# Altium PCB PCB1.PcbDoc
Units mil, origin at the board's own origin, x right, y up, seen from the top; angles counter-clockwise.
Board outline 3850 x 2765 mil, 4 copper layers (Top Layer, GND, 3V3, Bottom Layer 1), stack 23.756 mil thick; 67 components, 82 nets, 282 pads, 92 vias.
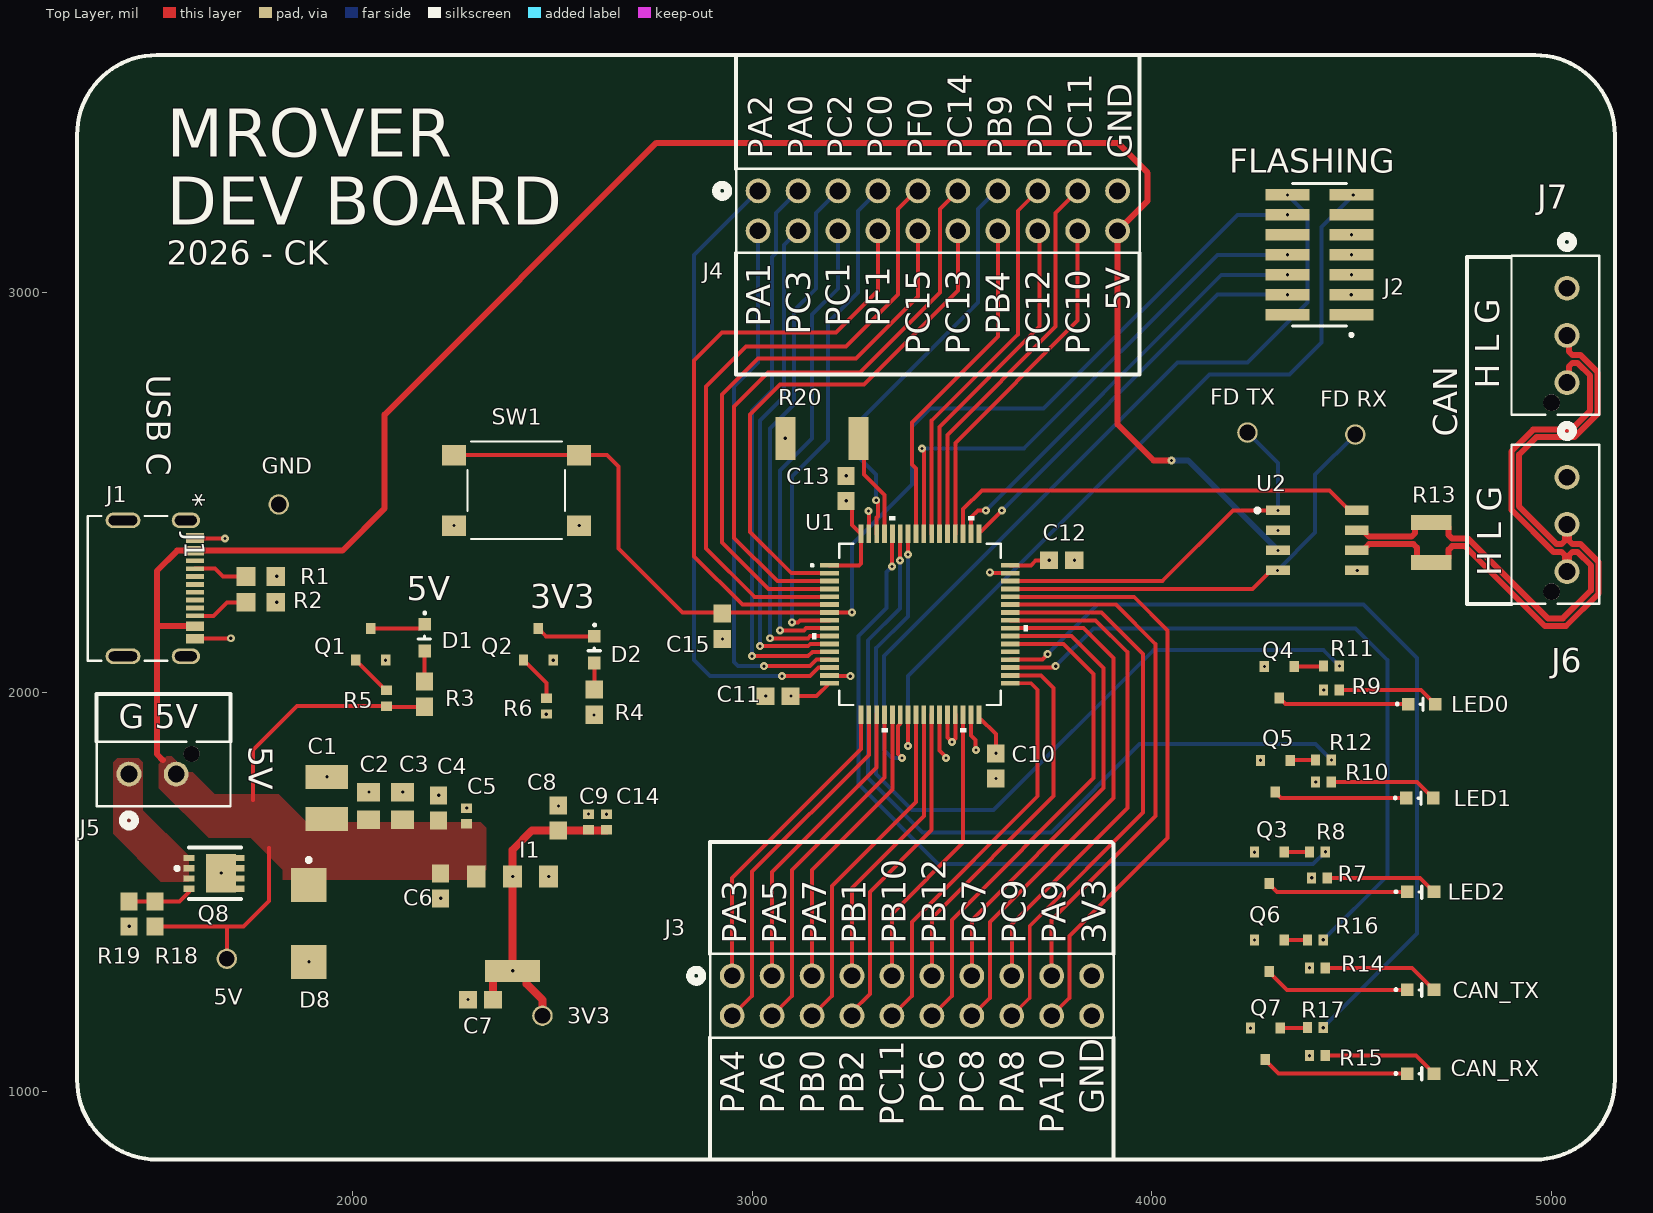
[diagram p0: Top Layer view]
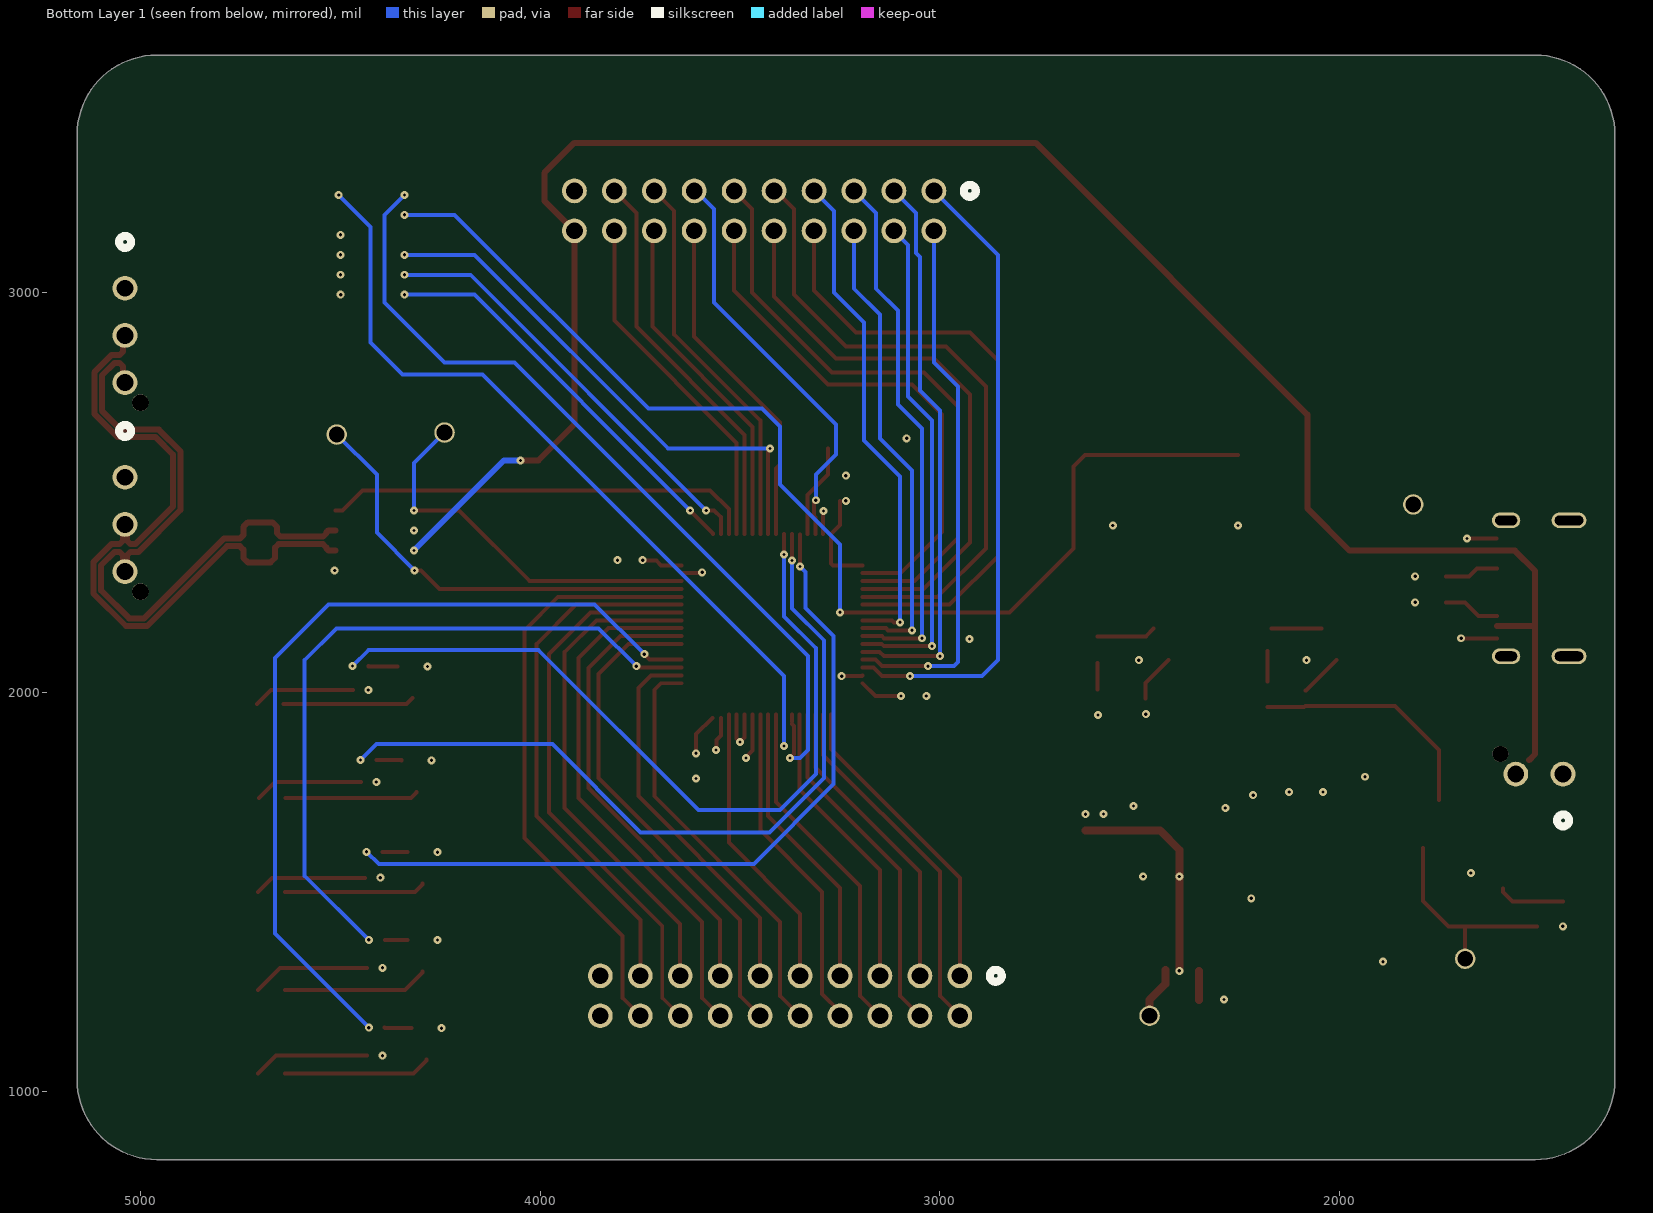
[diagram p1: Bottom Layer 1 view, seen from below]
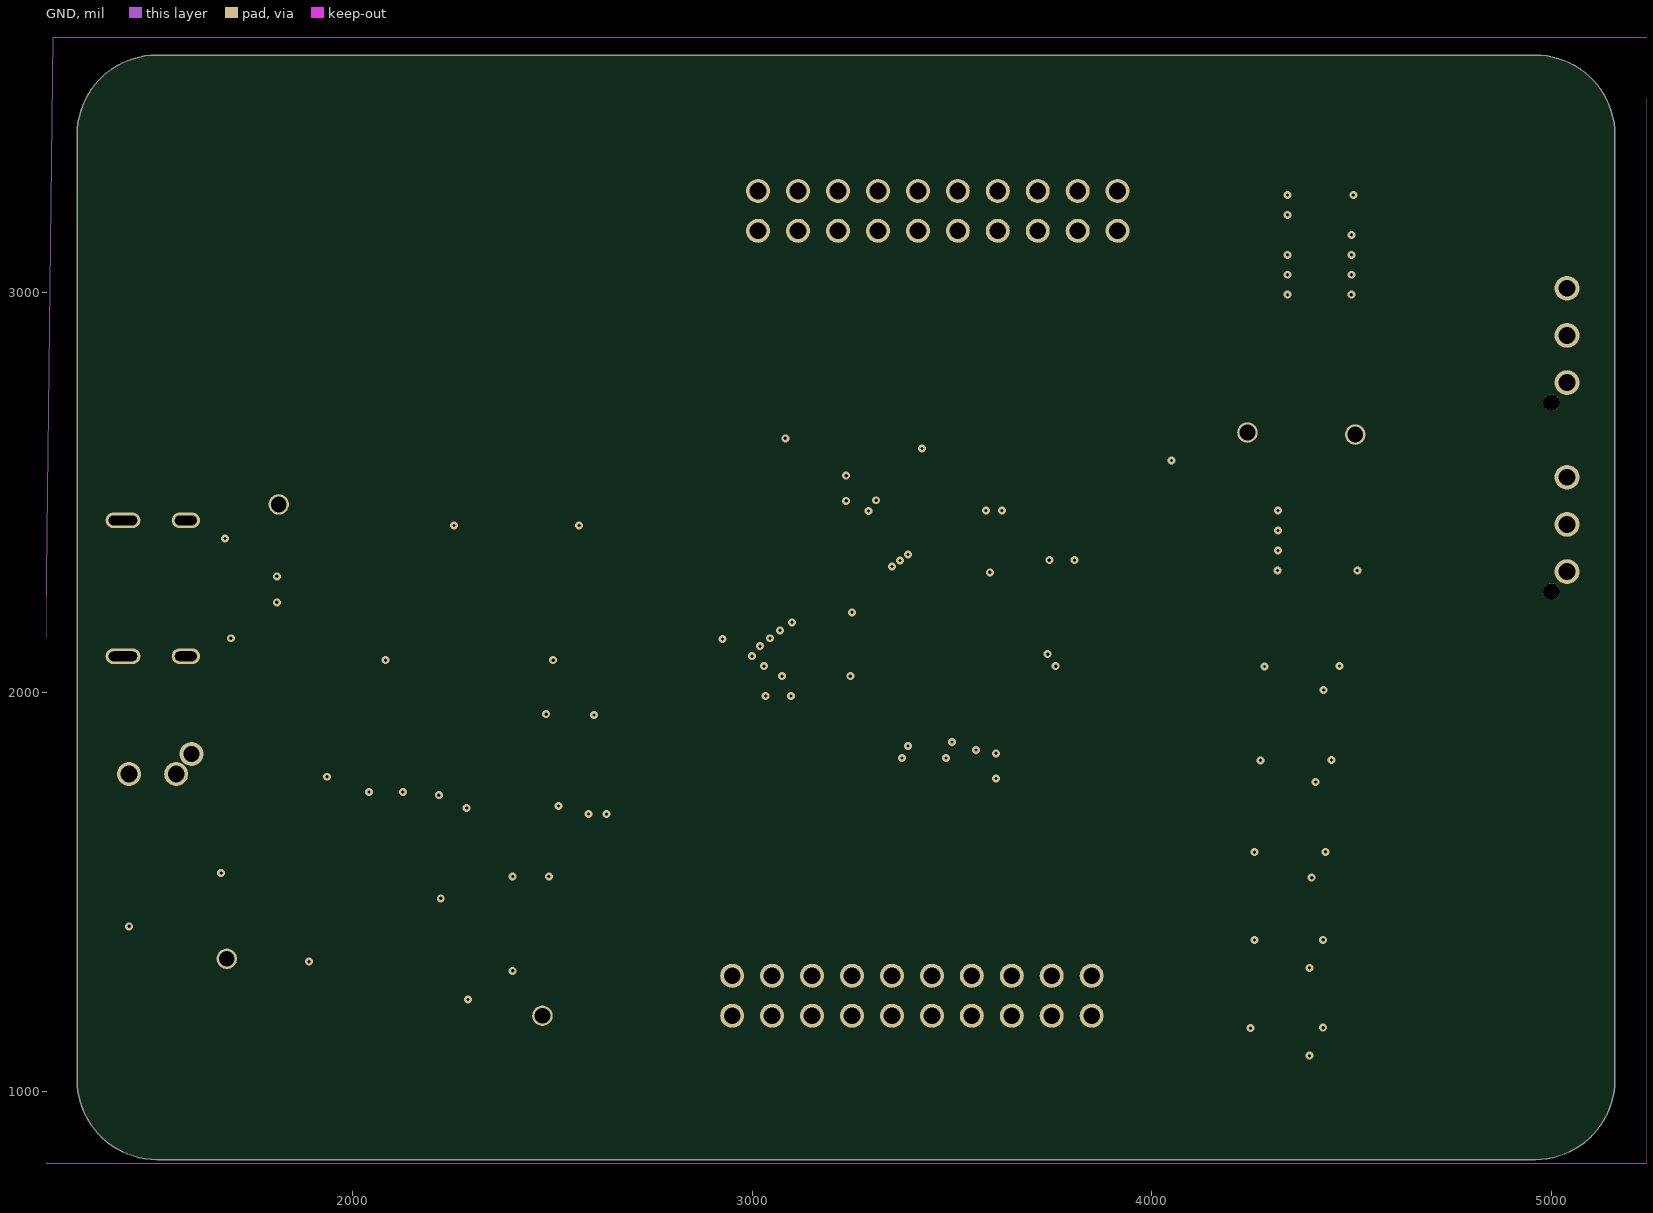
[diagram p2: GND]
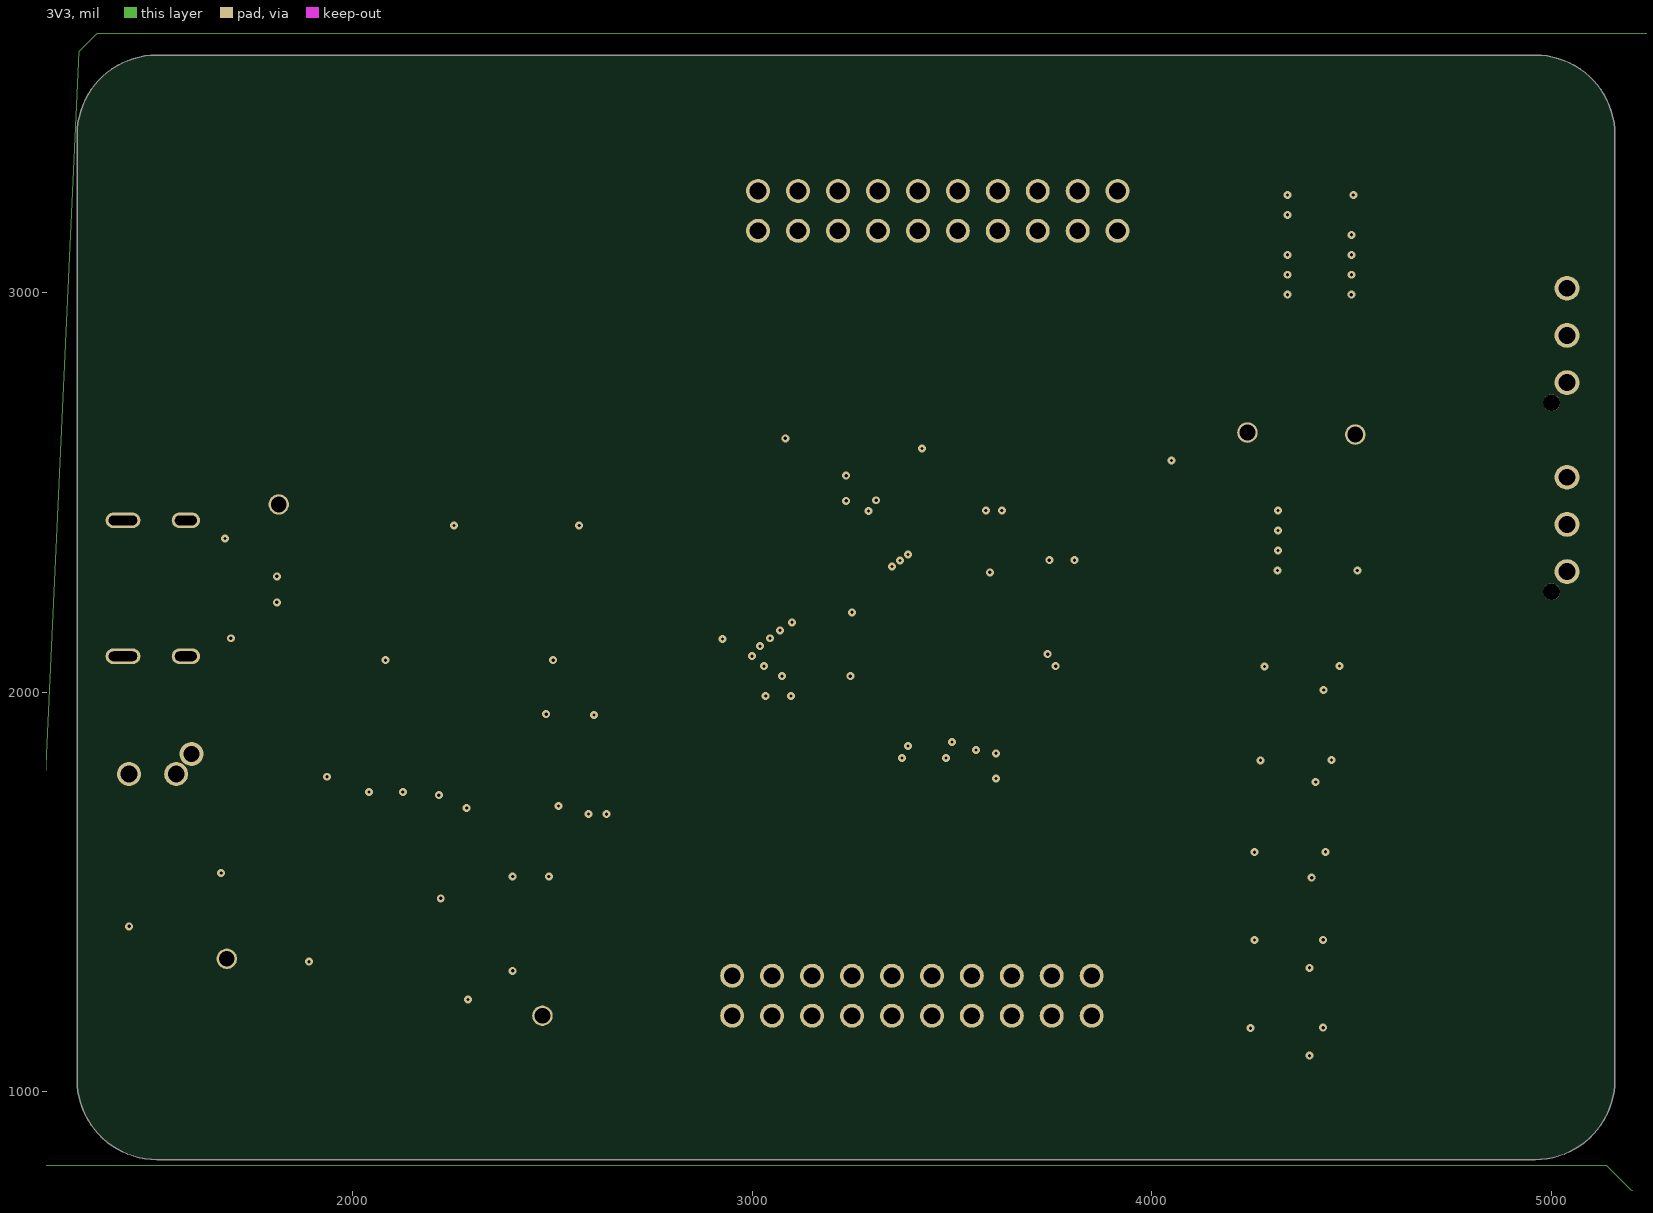
[diagram p3: 3V3]

## Layer stack, top to bottom
Top Solder: solder mask 0.4, Solder Resist, Dk 3.5
Top Layer: signal copper 1.378
Dielectric 2: prepreg 2.8, PP-006, Dk 4.1
GND: signal copper 1.4
Dielectric 1: dielectric 12.6, FR-4, Dk 4.8
3V3: signal copper 1.4
Dielectric 3: prepreg 2.8, PP-006, Dk 4.1
Bottom Layer 1: signal copper 1.378
Bottom Solder: solder mask 0.4, Solder Resist, Dk 3.5

## Board outline
1310,1030 1310,3395 cw(c1510,3395) 1510,3595 4960,3595 cw(c4960,3395) 5160,3395 5160,1030 cw(c4960,1030) 4960,830 1510,830 cw(c1510,1030)

## Design rules (kind name [scope] priority, off if disabled: settings)
BoardOutlineClearance [All] p1: gap=7.87 ignorepadtopadclearanceinfootprint=FALSE
Clearance [All] p1: gap=4 ignorepadtopadclearanceinfootprint=FALSE except(5: Arc-Via Track-Via SMDPad-Via THPad-Via Via-Via Via-Fill Via-Poly Via-Region Via-Text; 9.84: Arc-Hole Track-Hole SMDPad-Hole THPad-Hole Via-Hole Fill-Hole Poly-Hole Region-Hole Text-Hole)
ComponentClearance [All] p1: gap=4 collisioncheckmode=3 verticalgap=4 showdistances=TRUE
DiffPairsRouting [All] p1: maxlimit=4 minlimit=4 mostfreqgap=4 toplayer_minwidth=4 toplayer_maxwidth=71497.94 toplayer_prefwidth=4 midlayer1_minwidth=4 midlayer1_maxwidth=71497.94 midlayer1_prefwidth=4 midlayer2_minwidth=4 midlayer2_maxwidth=71497.94 midlayer2_prefwidth=4 bottomlayer_minwidth=4 bottomlayer_maxwidth=71497.94 bottomlayer_prefwidth=4 maxuncoupledlength=500
Height [All] p1: minheight=0 maxheight=71497.94 prefheight=500
HoleSize [All] p1: absolutevalues=TRUE maxlimit=248.03 minlimit=7.87 maxpercent=80.000 minpercent=20.000
HoleToHoleClearance [All] p1: gap=9.84 allowstackedmicrovias=FALSE
MinimumAnnularRing [All] p1: minimumring=3
MinimumSolderMaskSliver [All] p1: minsoldermaskwidth=0
PlaneClearance [All] p1: clearance=4
PlaneConnect PlaneConnectPowerPads [InPadClass('PowerPads')] p1: planeconnectstyle=Direct reliefexpansion=20 reliefentries=4 reliefconductorwidth=10 reliefairgap=10
PlaneConnect [All] p2: pad.planeconnectstyle=Relief pad.reliefexpansion=11.81 pad.reliefentries=4 pad.reliefconductorwidth=4 pad.reliefairgap=4 via.planeconnectstyle=Direct via.reliefexpansion=11.81 via.reliefentries=4 via.reliefconductorwidth=5 via.reliefairgap=5
PolygonConnect PolygonConnectPowerPads [All vs (InPadClass('PowerPads'))] p1: connectstyle=Direct reliefconductorwidth=10 reliefentries=4 polygonreliefangle="90 Angle" airgapwidth=10
PolygonConnect [All] p2: connectstyle=Direct reliefconductorwidth=4 reliefentries=4 polygonreliefangle="90 Angle" airgapwidth=4
RoutingVias [All] p1: holewidth=7.87 width=17.72 viastyle="Through Hole" minholewidth=7.87 minwidth=17.72 maxholewidth=248.03 maxwidth=257.87
SilkToSilkClearance [All] p1: silktosilkclearance=0
SilkToSolderMaskClearance [IsPad] p1: minsilkscreentomaskgap=4 clearancetoexposedcopper=TRUE
SolderMaskExpansion [All] p1: expansion=2.95 istentingtop=FALSE
SupplyNets "Schematic Supply Nets_2" [InNet('3V3')] p1: voltage=0.000
SupplyNets "Schematic Supply Nets_1" [InNet('GND')] p2: voltage=0.000
SupplyNets "Schematic Supply Nets" [InNet('5V')] p3: voltage=0.000
Width [All] p1: maxlimit=71497.94 minlimit=4 preferedwidth=4
20 further rules are at their usual default settings.

## Classes and differential pairs
component class MCU: * C8 C9 C10 C11 C12 C13 C14 C15 D3 D4 D5 J2 J3 J4 Q3 Q4 Q5 R7 R8 R9 R10 R11 R12 R20 SW1 U1
component class Input_Power: * C1 C2 C3 C4 C5 C6 C7 D1 D2 D8 I1 J1 J5 Q1 Q2 Q8 R1 R2 R3 R4 R5 R6 R18 R19 TP1 TP2 TP3
component class CAN: * D6 D7 "FD RX" "FD TX" J6 J7 Q6 Q7 R13 R14 R15 R16 R17 U2
differential pair CAN: +CAN_H -CAN_L

## Components (designator, comment, footprint, x,y, rotation, side; value= is the part's Value field where it differs from the comment)
3V3 "5003" TEST-POINT-0001 2475,1190 r0 top (schematic designator TP2)
5V "5003" TEST-POINT-0001 1685,1332.5 r0 top (schematic designator TP1)
C1 "CL32B106KBJNNNE" CAP-1210 1935,1735 r270 top
C2 "CC0805KKX7R9BB105" CAP-0805 2040,1715 r270 top
C3 "CC0805KRX7R9BB104" CAP-0805 2125,1715 r270 top
C4 "CC0603KPX7R9BB103" CAP-0603 2215,1710 r270 top
C5 "CC0402KRX7R9BB102" CAP-0402 2285,1690 r270 top
C6 "GRM188R61A106ME69D" CAP-0603 2220,1515 r270 top
C7 "GRM188R61A106ME69D" CAP-0603 2320,1230 r180 top
C8 "CC0603ZRY5V9BB104" CAP-0603 2515,1685 r90 top
C9 "GRM155R61A475MEAAD" CAP-0402 2590,1675 r90 top
C10 "CC0603ZRY5V9BB104" CAP-0603 3610,1815 r270 top
C11 "CC0603ZRY5V9BB104" CAP-0603 3065,1990 r180 top
C12 "CC0603ZRY5V9BB104" CAP-0603 3775,2330 r0 top
C13 "CC0603ZRY5V9BB104" CAP-0603 3235,2510 r90 top
C14 "GRM155R61A475MEAAD" CAP-0402 2635,1675 r90 top
C15 "CC0603ZRY5V9BB104" CAP-0603 2925,2165 r270 top
CAN_RX "BL-HKC36G-AV-TRB" LED-0603 4616.81,1015.42 r0 top (schematic designator D7)
CAN_TX "BL-HKC36G-AV-TRB" LED-0603 4616.81,1225.42 r0 top (schematic designator D6)
D1 "BL-HKC36G-AV-TRB" LED-0603 2150.43,2193.2 r270 top
D2 "BL-HKC36G-AV-TRB" LED-0603 2575.43,2163.2 r270 top
D8 "SMBJ40CA" "DO-214AA (SMBJ)" 1890,1420 r90 top
"FD RX" "5003" TEST-POINT-0001 4510,2645 r0 top (schematic designator TP5)
"FD TX" "5003" TEST-POINT-0001 4240,2650 r0 top (schematic designator TP4)
GND "5003" TEST-POINT-0001 1815,2470 r0 top (schematic designator TP3)
I1 "LM1117IMPX-3.3/NOPB" IC-SOT-223-4 2400,1420 r270 top
J1 "2171790001" 2171790001_MOL 1475,2260 r270 top
J2 "FTSH-107-01-L-DV-K" SAMTEC_FTSH-107-01-L-DV-K 4420.12,3095 r90 top
J3 "10897201" CONN20_0010897201_MOL 2950,1290 r0 top
J4 "10897201" CONN20_0010897201_MOL 3015,3255 r0 top
J5 "2068320201" CONN_2068320000-SD_02_MOL 1440,1795 r270 top
J6 "2165712003" CONN_2165710003-SD_03_MOL 5040,2538.11 r90 top
J7 "2165712003" CONN_2165710003-SD_03_MOL 5040,3011.22 r90 top
LED0 "BL-HKC36G-AV-TRB" LED-0603 4619.81,1940.42 r0 top (schematic designator D4)
LED1 "BL-HKC36G-AV-TRB" LED-0603 4614.81,1705.42 r0 top (schematic designator D5)
LED2 "BL-HKC36G-AV-TRB" LED-0603 4616.81,1470.42 r0 top (schematic designator D3)
Q1 "T2N7002AK,LM" IC-SOT23-3 2045,2120 r0 top
Q2 "T2N7002AK,LM" IC-SOT23-3 2465,2120 r0 top
Q3 "T2N7002AK,LM" IC-SOT23-3 4295,1560 r180 top
Q4 "T2N7002AK,LM" IC-SOT23-3 4320,2025 r180 top
Q5 "T2N7002AK,LM" IC-SOT23-3 4310,1790 r180 top
Q6 "T2N7002AK,LM" IC-SOT23-3 4295,1340 r180 top
Q7 "T2N7002AK,LM" IC-SOT23-3 4285,1119.37 r180 top
Q8 "CSD18543Q3AT" IC-8VSONCLIP 1555.47,1618.93 r270 top
R1 "RC0805JR-075K1L" RES-0805 1770,2290 r0 top
R2 "RC0805JR-075K1L" RES-0805 1770,2225 r0 top
R3 "RC0603FR-072KL" RES-0603 2180,1995 r90 top
R4 "RT0603FRE131KL" RES-0603 2605,1975 r90 top
R5 "RC0402FR-07470RL" RES-0402 2085,1985 r90 top
R6 "RC0402FR-07470RL" RES-0402 2485,1965 r90 top
R7 "RC0402FR-07100RL" RES-0402 4420,1535 r0 top
R8 "RC0402FR-07470RL" RES-0402 4415,1600 r180 top
R9 "RC0402FR-07100RL" RES-0402 4450,2005 r0 top
R10 "RC0402FR-07100RL" RES-0402 4430,1775 r0 top
R11 "RC0402FR-07470RL" RES-0402 4450,2065 r180 top
R12 "RC0402FR-07470RL" RES-0402 4430,1830 r180 top
R13 "RC1210FR-07120RL" RES-1210 4700,2375 r90 top
R14 "RC0402FR-07100RL" RES-0402 4415,1310 r0 top
R15 "RC0402FR-07100RL" RES-0402 4415,1090 r0 top
R16 "RC0402FR-07470RL" RES-0402 4410,1380 r180 top
R17 "RC0402FR-07470RL" RES-0402 4410,1160 r180 top
R18 "RES 0603" RES-0603 1505,1445 r270 top
R19 "RES 0603" RES-0603 1440,1445 r90 top
R20 "CRF2010-J/-000ELF" RES-2010 3175,2635 r0 top
SW1 "430182095816" 430182095816 2410,2505 r0 top
U1 "STM32G431RBT6" LQFP64-10x10mm 3420,2170 r0 top
U2 "TCAN1044VDRQ1" IC-8SOIC 4415,2380 r270 top

## Footprints (in the part's own frame and the unit in brackets; to place one, negate y for a bottom-side part, rotate by r counter-clockwise, add the part's x,y. Pads: shape width x height; smd on the part's side, far side on the other; paste and mask are expansions set on the pad)
2171790001_MOL [mil]
  oval 39x87 hole 71 slot 24 at 0 deg paste-99999 mask-43.5: 13(-170.08,-50.07) 14(170.08,-50.07)
  oval 39x71 hole 55 slot 24 at 0 deg paste-99999 mask-35.5: 15(-170.08,107.41) 16(170.08,107.41)
  rect 24x45 smd paste+0 mask+0: A1/B12(-125.98,130.05) A4/B9(-94.49,130.05) B1/A12(125.98,130.05) B4/A9(94.49,130.05)
  rect 12x45 smd paste+0 mask+0: A5(-49.21,130.05) A6(-9.84,130.05) A7(9.84,130.05) A8(49.21,130.05) B5(68.9,130.05) B6(29.53,130.05) B7(-29.53,130.05) B8(-68.9,130.05)
  silkscreen extent -181,-138 181,61
430182095816 [mm] "SMD Tact Switch, body 6x6mm"
  rect 1.55x1.3 smd: A1(-3.975,2.25) A2(3.975,2.25) B1(-3.975,-2.25) B2(3.975,-2.25)
  silkscreen extent -3.1,-3.1 3.1,3.1, body extent -4.5,-3.1 4.5,3.1, height 9.5
CAP-0402 [mm]
  rect 0.6x0.7 smd: 1(-0.5,0) 2(0.5,0)
  body extent -0.5,-0.22 0.5,0.23, height 0.5
CAP-0603 [mm]
  rect 1.15x1.1 smd: 1(-0.8,0) 2(0.8,0)
  body extent -0.8,-0.45 0.8,0.45, height 0.8
CAP-0805 [mm]
  rect 1.16x1.47 smd: 1(-0.88,0) 2(0.88,0)
  body extent -1,-0.63 1,0.63, height 0.94
CAP-1210 [mm]
  rect 1.53x2.72 smd: 1(-1.341,0) 2(1.341,0)
  body extent -1.6,-1.25 1.6,1.25, height 2.7
CONN20_0010897201_MOL [mil]
  round 62 / inner round 60 / far side round 62 hole 42 paste-99999 mask+0: 1(0,0) 2(0,-100) 3(100,0) 4(100,-100) 5(200,0) 6(200,-100) 7(300,0) 8(300,-100) 9(400,0) 10(400,-100) 11(500,0) 12(500,-100) 13(600,0) 14(600,-100) 15(700,0) 16(700,-100) 17(800,0) 18(800,-100) 19(900,0) 20(900,-100)
  silkscreen extent -105,-155 955,55, body extent -51,-147 949,53, height 329
CONN_2068320000-SD_02_MOL [mil]
  round 62 / inner round 60 / far side round 62 hole 42 paste-99999 mask+0: 1(0,0) 2(0,118.11)
  round 40 / inner round 60 / far side round 40 hole 40 unplated paste-99999 mask+0: 3(-50.39,156.69)
  silkscreen extent -81,-81 131,254, body extent -76,-76 76,249, height 392
CONN_2165710003-SD_03_MOL [mil]
  round 62 hole 42 paste-99999 mask+0: 1(0,0) 2(-118.11,0) 3(-236.22,0)
  round 42 hole 42 unplated paste-99999 mask+0: 4(-286.61,38.58)
  silkscreen extent -317,-81 131,139, body extent -312,-75 76,135, height 394
"DO-214AA (SMBJ)" [mm]
  rect 2.16x2.26 smd: 1(-2.416,0) 2(2.484,0)
  silkscreen extent 3.94,-0.13 4.19,0.12, body extent -2.72,-1.95 2.78,1.95, height 2.45
IC-8SOIC [mm]
  rect 0.6x1.5 smd: 1(-1.905,-2.5) 2(-0.635,-2.5) 3(0.635,-2.5) 4(1.905,-2.5) 5(1.905,2.5) 6(0.635,2.5) 7(-0.635,2.5) 8(-1.905,2.5)
  silkscreen extent -2.03,-3.93 -1.78,-3.68, body extent -2.45,-3 2.45,3, height 1.75
IC-8VSONCLIP [mm]
  rect 0.4x0.7 smd paste-100 mask+0.05: 1(2.812,0.877) 2(0.862,0.877) 2(1.512,0.877) 2(2.162,0.877) 3(0.862,4.077) 3(1.512,4.077) 3(2.162,4.077) 3(2.812,4.077)
  rect 2.45x1.9 smd paste-100 mask+0.05: 3(1.837,2.917)
  silkscreen extent 0.19,0.03 3.49,4.18, body extent 0.18,0.89 3.48,4.19, height 1.1
IC-SOT23-3 [mm]
  rect 0.6x0.7 smd: 1(-0.95,-1) 2(0.95,-1) 3(0,1)
  body extent -1.46,-1.18 1.46,1.19, height 1.12
IC-SOT-223-4 [mm]
  rect 1.4x1.2 smd mask+0.07: 1(-3,2.3) 3(-3,-2.3) 4(-3,0)
  rect 1.4x3.5 smd: 2(3,0)
  body extent -3.5,-3.25 3.5,3.25, height 1.68
LED-0603 [mm]
  rect 0.8x0.8 smd: 1(2.291,0.751) 2(0.589,0.751)
  silkscreen extent -0.2,0.34 1.52,1.13, body extent 0.65,0.36 2.25,1.16, height 0.39
LQFP64-10x10mm [mil]
  rect 47x12 smd paste+0 mask+0: 1(-226.38,147.64) 2(-226.38,127.95) 3(-226.38,108.27) 4(-226.38,88.58) 5(-226.38,68.9) 6(-226.38,49.21) 7(-226.38,29.53) 8(-226.38,9.84) 9(-226.38,-9.84) 10(-226.38,-29.53) 11(-226.38,-49.21) 12(-226.38,-68.9) 13(-226.38,-88.58) 14(-226.38,-108.27) 15(-226.38,-127.95) 16(-226.38,-147.64) 33(226.38,-147.64) 34(226.38,-127.95) 35(226.38,-108.27) 36(226.38,-88.58) 37(226.38,-68.9) 38(226.38,-49.21) 39(226.38,-29.53) 40(226.38,-9.84) 41(226.38,9.84) 42(226.38,29.53) 43(226.38,49.21) 44(226.38,68.9) 45(226.38,88.58) 46(226.38,108.27) 47(226.38,127.95) 48(226.38,147.64)
  rect 12x47 smd paste+0 mask+0: 17(-147.64,-226.38) 18(-127.95,-226.38) 19(-108.27,-226.38) 20(-88.58,-226.38) 21(-68.9,-226.38) 22(-49.21,-226.38) 23(-29.53,-226.38) 24(-9.84,-226.38) 25(9.84,-226.38) 26(29.53,-226.38) 27(49.21,-226.38) 28(68.9,-226.38) 29(88.58,-226.38) 30(108.27,-226.38) 31(127.95,-226.38) 32(147.64,-226.38) 49(147.64,226.38) 50(127.95,226.38) 51(108.27,226.38) 52(88.58,226.38) 53(68.9,226.38) 54(49.21,226.38) 55(29.53,226.38) 56(9.84,226.38) 57(-9.84,226.38) 58(-29.53,226.38) 59(-49.21,226.38) 60(-68.9,226.38) 61(-88.58,226.38) 62(-108.27,226.38) 63(-127.95,226.38) 64(-147.64,226.38)
  silkscreen extent -273,-270 270,270, body extent -236,-236 236,236, height 63
RES-0402 [mm]
  rect 0.6x0.7 smd: 1(-0.5,0) 2(0.5,0)
  body extent -0.5,-0.25 0.5,0.25, height 0.3
RES-0603 [mm]
  rect 1.15x1.1 smd: 1(-0.8,0) 2(0.8,0)
  body extent -0.8,-0.4 0.8,0.4, height 0.43
RES-0805 [mm]
  rect 1.2x1.2 smd: 1(-0.95,0) 2(0.95,0)
  body extent -1,-0.6 1,0.6, height 0.71
RES-1210 [mm] "Chip Resistor, 2-Leads, Body 3.10x2.60mm, IPC High Density"
  rect 0.95x2.6 smd: 1(-1.275,0) 2(1.275,0)
  body extent -1.6,-1.35 1.6,1.35, height 0.6
RES-2010 [mm]
  rect 1.26x2.72 smd: 1(-2.325,0) 2(2.325,0)
  body extent -2.5,-1.25 2.5,1.25, height 0.7
SAMTEC_FTSH-107-01-L-DV-K [mm]
  rect 0.74x2.79 smd: 01(-3.81,-2.035) 02(-3.81,2.035) 03(-2.54,-2.035) 04(-2.54,2.035) 05(-1.27,-2.035) 06(-1.27,2.035) 07(0,-2.035) 08(0,2.035) 09(1.27,-2.035) 10(1.27,2.035) 11(2.54,-2.035) 12(2.54,2.035) 13(3.81,-2.035) 14(3.81,2.035)
  silkscreen extent -5.19,-2.13 4.53,1.72, body extent -4.44,-2.82 4.44,3.02, height 5.96
TEST-POINT-0001 [mm] "2024 miniature test point"
  round 1.3 hole 1: 1(0,0)
  body extent -1.27,-1.27 1.27,1.27, height 4.57

## Part data
3V3 5V "FD RX" "FD TX" GND: library part TEST-POINT-0001, "Oranange PC Test Point, Miniature Phoisphor Bronze Silver Plating Through Hole Mounting Type"
C1: library part "CAP 1210", Capacitance="10 uF", Voltage Rating="50 V"
C2: library part "CAP 0805", Capacitance="1 uF", Voltage Rating=50V
C3: library part "CAP 0805", Capacitance="100 nF", Voltage Rating=50V
C4: library part "CAP 0603", Capacitance="10 nF", Voltage Rating=50V
C5: library part "CAP 0402", Capacitance="1 nF", Voltage Rating=50V
C6 C7: library part "CAP 0603", Capacitance="10 uF", Voltage Rating="10 V"
C8 C10 C11 C12 C13 C15: library part "CAP 0603", Capacitance="100 nF", Voltage Rating=50V
C9 C14: library part "CAP 0402", Capacitance="4.7 uF", Voltage Rating=10V
CAN_RX CAN_TX D1 D2 LED0 LED1 LED2: library part LED-0001, "LED YELLOW CLEAR 0603 SMD", Forward Current=30mA, Forward Voltage=2V, ComponentLink1Description=Datasheet, ComponentLink1URL=https://www.americanbrightled.com/pdffiles/led-components/smt/BL-HKC36G-AV-TRB.pdf
D8: library part DIO-TVS-0001, "TVS DIODE 40VWM 64.5VC DO214AA", Current Rating=9.3A, Voltage Rating=64.5V, ComponentLink1Description=Datasheet, ComponentLink1URL=https://www.littelfuse.com/media?resourcetype=datasheets&itemid=09a6ae9a-73cb-4ac4-acac-e6dab92ab953&filename=littelfuse_tvs_diode_smbj_datasheet.pdf
I1: library part IC_LDO_3V3_0001, "IC REG LIN 3.3V 800MA SOT223-4", ComponentLink1Description="New link", ComponentLink1URL=https://www.ti.com/lit/ds/symlink/lm1117.pdf?HQS=dis-dk-null-digikeymode-dsf-pf-null-wwe&ts=1721700739746
J1: "Universal Serial Bus (USB) Shielded I/O Receptacle, Type C, Right-Angle, Top Mount, Surface Mount, Single Row, 16 Circuits, Gold (Au) Plating", Manufacturer_Name="Molex Connector Corporation", Copyright="Copyright (C) 2025 Ultra Librarian. All rights reserved.", Manufacturer_Part_Number=2171790001, RefDes=RefDes, Type=Type
J2: library part CONN_Flashing-0001, "Connector Header Surface Mount 14 position 0.050\" (1.27mm)", Package=None, Availability=Unavailable, ComponentLink1Description=Datasheet, ComponentLink1URL=https://mm.digikey.com/Volume0/opasdata/d220001/medias/docus/6209/ftsh-1xx-xx-xxx-dv-xxx-xxx-x-xx-mkt.pdf, MF=Samtec, MP=FTSH-107-01-L-DV-K, Price=None
J3 J4: library part CONN-20, "2.54mm Pitch C-Grid Breakaway Header, Dual Row, Vertical, High Temperature, 20 Circuits, Tin (Sn) Plating, 2.72mm PC Tail Length", Manufacturer_Name="Molex Connector Corporation", Copyright="Copyright (C) 2025 Ultra Librarian. All rights reserved.", Datasheet=https://www.molex.com/en-us/products/part-detail-pdf/10897201?display=pdf, Manufacturer_Part_Number=10897201, RefDes=RefDes, Type=Type
J5: library part "CONN MF+ 2 PIN VERT", "Micro-Fit+ Vertical Header, Through Hole, 3.00mm Pitch, Dual Row, 2 Circuits, Tin (Sn) Plating, Glow-Wire Capable, Black, Tray", Manufacturer_Name="Molex Connector Corporation", Copyright="Copyright (C) 2025 Ultra Librarian. All rights reserved.", Manufacturer_Part_Number=2068320201, RefDes=RefDes, Type=Type
J6 J7: library part "CONN MF+ 3 PIN VERT", "Micro-Fit+ Vertical Header, Through Hole, 3.00mm Pitch, Single Row, 3 Circuits, 0.38Âµm Gold (Au) Plating, Glow-Wire Capable, Black", Manufacturer_Name="Molex Connector Corporation", Copyright="Copyright (C) 2026 Ultra Librarian. All rights reserved.", Manufacturer_Part_Number=2165712003, RefDes=RefDes, Type=Type
Q1 Q2 Q3 Q4 Q5 Q6 Q7: library part NMOS-200MA-0001, "MOSFET N-CH 60V 200MA SOT23", Continuous Current=200mA, Voltage=60V, ComponentLink1Description=Datasheet, ComponentLink1URL=https://toshiba.semicon-storage.com/info/T2N7002AK_datasheet_en_20150401.pdf?did=29712&prodName=T2N7002AK
Q8: library part NMOS-60A-0001, "MOSFET N-CH 60V 12A/60A 8VSON", Continuous Current=60A, Voltage=60V, ComponentLink2Description=Datasheet, ComponentLink2URL=http://www.ti.com/lit/ds/symlink/csd18543q3a.pdf
R1 R2: library part "RES 0805", Resistance="5.1k Ω", Wattage="1/8 W"
R3: library part "RES 0603", Resistance="2k Ω", Wattage="1/10 W"
R4: library part "RES 0603", Resistance="1k Ω", Wattage="1/10 W"
R5 R6 R8 R11 R12 R16 R17: library part "RES 0402", Resistance="470 Ω", Wattage="1/16 W"
R7 R9 R10 R14 R15: library part "RES 0402", Resistance="100 Ω", Wattage="1/16 W"
R13: library part "RES CAN TERM 1210", Resistance=120Ω, Wattage="1/2 W"
R18: Resistance=200kΩ, Wattage=100mW
R19: Resistance=100kΩ, Wattage=100mW
R20: library part RES-0-0001, "0 Ohms Jumper Chip Resistor 2010 (5025 Metric) Automotive AEC-Q200 Metal Element", Resistance=0Ω, Tolerance=1%, ComponentLink1Description=Datasheet, ComponentLink1URL=https://www.yageo.com/upload/media/product/products/datasheet/rchip/PYu-RC_Group_51_RoHS_L_12.pdf, Size=0402
SW1: library part BUTTON-VERT-12V-0.5A, "WS-TASV SMT Tact Switch, 6mm x 6mm, 160gf, SPST-NO, 12V, 50mA", Manufacturer="Wurth Elektronik", Max Operating Temperature=85°C, Min Operating Temperature=-40°C, Rated Current=50mA, Rated Voltage (DC)=12V, Category="Tact Switch", Circuit=SPST-NO, ComponentLink1Description="Website Link", ComponentLink1URL=https://www.we-online.com/redexpert/article/430182095816?ad, ComponentLink2Description="Datasheet Link", ComponentLink2URL=https://www.we-online.com/redexpert/spec/430182095816?ad, Contact Material="Stainless Steel", Contact Plating=Silver, Height=9.5mm, Length=6mm, Manufacturer Part Number=430182095816, Match Code=WS-TASV, Mount="Surface Mount", Operation Force=160gf, Packaging="Tape and Reel", Terminal Material="Copper Alloy", Terminal Plating=Silver, Washable=No, Width=6mm
U1: library part IC-STM32G431RBT6, "Mainstream Arm Cortex-M4 MCU 170 MHz with 128 Kbytes of Flash memory, Math Accelerator, Medium Analog level integration", Manufacturer_Name=STMicroelectronics, Copyright="Copyright (C) 2025 Ultra Librarian. All rights reserved.", Datasheet=https://www.st.com/resource/en/datasheet/stm32g431c6.pdf, Manufacturer_Part_Number=STM32G431RBT6, RefDes=RefDes, Type=Type
U2: library part IC-CAN-0001, "IC TRANSCEIVER 1/1 8SOIC", ComponentLink1Description=Datasheet, ComponentLink1URL=https://www.ti.com/lit/ds/symlink/tcan1044-q1.pdf?HQS=dis-dk-null-digikeymode-dsf-pf-null-wwe&ts=1728758303289&ref_url=https%253A%252F%252Fwww.ti.com%252Fgeneral%252Fdocs%252Fsuppproductinfo.tsp%253FdistId%253D10%2526gotoUrl%253Dhttps%253A%252F%252Fwww.ti.com%252Flit%252Fgpn%252Ftcan1044-q1

## Via types
v1: diameter 20, hole 8, Top Layer to Bottom Layer 1, 92 vias

## Nets (pads, with @x,y where several pads share a name; then routed paths per layer and width w, separated by ;. In a path a pad name is that pad's centre, name@x,y a point inside that pad or via, vN(x,y) a via of type N, cw(c..) or ccw(c..) an arc to the next point about the centre after c; other vN are vias at no path point)
3V3: 3V3.1 C7.1 C8.1 C9.1 C10.1 C11.1 C12.1 C13.1 C14.1 I1.2 I1.4 J2.03 J3.19 R4.1 R6.1 R7.1 R9.1 R10.1 R14.1 R15.1 U1.1 U1.16 U1.28 U1.29 U1.32 U1.48 U1.64 U2.5 | length 1469.3
  Top Layer w10: C11.1 3161.26,1990 U1.16 ; U1.1 3267.64,2317.64 3272.36,2322.36 U1.64 3250,2418.74 C13.1@3250,2478.5 ; U1.28 3488.9,1887.09 v1(3500.49,1875.49) 3508.58,1883.58 U1.29 ; U1.32@3569.75,1935.25 3610,1895 C10.1 ; U1.48 3697.64,2317.64 3710,2330 C12.1
  Top Layer w20: C7.1 I1.2@2351.5,1301.5 ; I1.2 I1.4 ; v1(2400.49,1538.6) 2400.49,1605.49 2448.5,1653.5 C8.1 C14.1@2635,1653.5 ; I1.2@2435,1305 2435,1270 2475,1230 3V3.1
  other v1: 4395.31,1090 2400.49,1302.38 4395.31,1310 4400.81,1535.49 4410.81,1775.49 3610.49,1846.99 2604.51,1943.01 2484.51,1944.82 3096.99,1990.49 4430.81,2005.49 4515,2305 3744,2330.49 3235.49,2479 4500,2995
5V: 5V.1 C1.2 C2.2 C3.2 C4.2 C5.2 C6.1 D8.2 I1.3 J1.A4/B9 J1.B4/A9 J4.20 J5.2 R3.1 R5.1 R18.2 U2.3 | length 5979.5
  Top Layer w10: R18.2 1726.5,1413.5 1790,1477.01 1790,1610 ; 5V.1 1685,1410 ; 1750,1730 1750,1855 1860.32,1965.32 R5.1 ; R5.1@2088.19,1963.5 R3.1
  Top Layer w15: 1510.51,2165.51 J1.B4/A9 ; 1525,1830 1510,1845 1510,2303.98 1560.51,2354.49 J1.A4/B9 1974.49,2354.49 2080,2460 2080,2695 2760,3375 3915,3375 3990,3300 3990,3230 J4.20 3915,2670 4005,2580 v1(4050,2580)
  Bottom Layer 1 w15: v1(4050,2580) 4091.57,2580 v1(4316.57,2355)
BOOT: R20.2 U1.61 | length 234.9
  Top Layer w10: R20.2@3280,2610 3280,2545 3331.42,2493.58 U1.61
CAN_H: J6.3 J7.3 R13.2 U2.7 | length 1747.5
  Top Layer w15: U2.7 4531.14,2405 4535.45,2400.69 4535.45,2398.29 4544.24,2389.5 4650.81,2389.5 4659.6,2398.29 4659.6,2414 4670.8,2425.2 R13.2 4732.48,2425.2 4743.68,2414 4743.68,2393.29 4752.47,2384.5 4792.37,2384.5 4992.22,2184.65 5029.65,2184.65 5100,2255 5100,2317.55 5066.11,2351.44 5053.68,2351.44 5044.89,2342.66 5044.89,2306.78 J6.3 5035.11,2306.78 5035.11,2342.66 5026.32,2351.44 5006.02,2351.44 4901,2456.47 4901,2602.87 4955.41,2657.28 5050.41,2657.28 5097.85,2704.72 5097.85,2792.81 5066.11,2824.56 5053.68,2824.56 5044.89,2815.77 5044.89,2779.89 J7.3
CAN_L: J6.2 J7.2 R13.1 U2.6 | length 1820.5
  Top Layer w15: U2.6 4531.14,2355 4535.45,2359.31 4535.45,2361.71 4544.24,2370.5 4655.81,2370.5 4664.6,2361.71 4664.6,2336 4675.8,2324.8 R13.1 4732.48,2324.8 4743.68,2336 4743.68,2356.71 4752.47,2365.5 4784.5,2365.5 4984.35,2165.65 5037.52,2165.65 5119,2247.13 5119,2325.42 5073.98,2370.44 5053.68,2370.44 5044.89,2379.23 5044.89,2415.11 J6.2 5035.11,2415.11 5035.11,2379.23 5026.32,2370.44 5013.89,2370.44 4920,2464.34 4920,2595 4963.28,2638.28 5058.28,2638.28 5116.85,2696.85 5116.85,2800.68 5073.98,2843.56 5053.68,2843.56 5044.89,2852.34 5044.89,2888.22 J7.2
CAN_RX_LED: R17.1 U1.36 | length 2154.4
  Top Layer w10: U1.36 3726.42,2081.42 v1(3740,2095)
  Bottom Layer 1 w10: v1(3740,2095) 3865,2220 4530,2220 4665,2085 4665,1395.32 v1(4429.69,1160)
CAN_STB: U1.51 U2.8 | length 1087.1
  Top Layer w10: U1.51 3528.27,2458.27 3575,2505 4445.71,2505 4495.71,2455 U2.8
CAN_TX_LED: R16.1 U1.35 | length 1783.9
  Top Layer w10: U1.35 3756.73,2061.73 v1(3760,2065)
  Bottom Layer 1 w10: v1(3760,2065) 3855,2160 4510,2160 4590,2080 4590,1540.32 v1(4429.69,1380)
FDCAN_RX: "FD RX.1" U1.45 U2.4 | length 1110.2
  Top Layer w10: U1.45 4252.44,2258.58 4298.86,2305 v1(4315,2305) U2.4
  Bottom Layer 1 w10: v1(4315,2305) 4409.52,2399.52 4409.52,2544.52 4510,2645
FDCAN_TX: "FD TX.1" U1.46 U2.1 | length 970.1
  Top Layer w10: U1.46 4026.73,2278.27 4203.46,2455 v1(4316.57,2455)
  Bottom Layer 1 w10: 4240,2650 4316.57,2573.43 v1(4316.57,2455)
GND: C1.1 C2.1 C3.1 C4.1 C5.1 C6.2 C7.2 C8.2 C9.2 C10.2 C11.2 C12.2 C13.2 C14.2 C15.2 D8.1 GND.1 I1.1 J1.A1/B12 J1.B1/A12 J2.05 J2.07 J2.09 J3.20 J4.19 J6.1 J7.1 Q1.2 Q2.2 Q3.2 Q4.2 Q5.2 Q6.2 Q7.2 Q8.3 R1.2 R2.2 R19.1 R20.1 SW1.B1 SW1.B2 U1.15 U1.27 U1.31 U1.47 U1.63 U2.2 | length 524.2
  Top Layer w10: J1.B1/A12 1694.02,2134.02 v1(1695,2135) ; J1.A1/B12@1606.03,2385 v1(1680,2385) ; U1.15 3194.62,2041.05 3244.68,2041.05 v1(3245.73,2040) ; U1.63 v1@3292.05,2453.8 ; U1.27 3469.21,1912.59 3468.9,1912.28 3468.9,1853.81 3485,1837.71 v1(3485,1835) ; U1.31@3547.95,1935 3547.95,1891.67 3559.13,1880.49 3559.13,1856.86 v1(3560.49,1855.49) ; v1@3597.05,2297.95 U1.47
  other v1: 4247.6,1158.74 2289,1230.49 1890.49,1325.37 4257.6,1379.37 1440.49,1414 2220.49,1484 2491.04,1538.6 1670.8,1547.1 4257.6,1599.37 2635.57,1694.43 2590,1695 2285.49,1710.18 2515,1715 2215.49,1741.99 2040.49,1750.14 2125.49,1750.14 3610.49,1784 1935.49,1788.29 4272.6,1829.37 3034,1990.49 4282.6,2064.37 2081.91,2080.14 2501.91,2080.14 2925.49,2133.01 1810,2225 1810,2290 3595,2300 3806.99,2330.49 4316.57,2405 2254,2416.91 2566.99,2416.91 3291.55,2453.8 3235.49,2541.99 3082.97,2635.49 4500.24,3045 4500.24,3095 4500.24,3145
LED0: R11.1 U1.58 | length 2014.3
  Top Layer w4: U1.58@3390,2395.91 U1.58
  Top Layer w10: v1(3390,2345) U1.58@3390,2395.91
  Bottom Layer 1 w10: v1(3390,2345) 3390,2190 3310,2110 3310,1795 3400.16,1704.84 3604.84,1704.84 4005,2105 4430.67,2105 v1(4470.18,2065.49)
LED1: R12.1 U1.59 | length 1969.3
  Top Layer w4: U1.59@3370,2395.59 U1.59
  Top Layer w10: v1(3370,2330) U1.59@3370,2395.59
  Bottom Layer 1 w10: v1(3370,2330) 3370,2210 3290,2130 3290,1785 3426,1649 3749,1649 3970,1870 4410.67,1870 v1(4450.18,1830.49)
LED2: R8.1 U1.60 | length 1926.9
  Top Layer w4: U1.60@3350,2395.28 U1.60
  Top Layer w10: v1(3350,2315) U1.60@3350,2395.28
  Bottom Layer 1 w10: v1(3350,2315) 3336.26,2301.26 3336.26,2211.26 3265.73,2140.73 3265.73,1769.68 3465.4,1570 4404.69,1570 v1(4435.18,1600.49)
NetD1_1: D1.1 R3.2 | length 76.5
  Top Layer w10: R3.2 D1.1
NetD1_2: D1.2 Q1.3 | length 124.4
  Top Layer w10: Q1.3 D1.2@2169.37,2159.37
NetD2_1: D2.1 R4.2 | length 66.5
  Top Layer w10: R4.2 D2.1
NetD2_2: D2.2 Q2.3 | length 148
  Top Layer w10: Q2.3 2484.37,2140 D2.2
NetD3_1: LED2.1 R7.2 | length 281.8
  Top Layer w10: R7.2 4672,1535 LED2.1
NetD3_2: LED2.2 Q3.3 | length 354.7
  Top Layer w10: Q3.3 4295,1518.66 4313.66,1500 LED2.2
NetD4_1: LED0.1 R9.2 | length 254.8
  Top Layer w10: R9.2 4675,2005 LED0.1
NetD4_2: LED0.2 Q4.3 | length 329.5
  Top Layer w10: Q4.3 4335.63,1970 LED0.2
NetD5_1: LED1.1 R10.2 | length 271.9
  Top Layer w10: R10.2 4665,1775 LED1.1
NetD5_2: LED1.2 Q5.3 | length 335.6
  Top Layer w10: Q5.3 4310,1748.66 4323.66,1735 LED1.2
NetD6_1: CAN_TX.1 R14.2 | length 295.1
  Top Layer w10: R14.2 4652,1310 CAN_TX.1
NetD6_2: CAN_TX.2 Q6.3 | length 365.1
  Top Layer w10: Q6.3 4295,1298.66 4338.66,1255 CAN_TX.2
NetD7_1: CAN_RX.1 R15.2 | length 291
  Top Layer w10: R15.2 4662,1090 CAN_RX.1
NetD7_2: CAN_RX.2 Q7.3 | length 370.7
  Top Layer w10: Q7.3 4285,1078.03 4318.03,1045 CAN_RX.2
NetJ1_A5: J1.A5 R1.1 | length 135.5
  Top Layer w10: J1.A5 1655.79,2309.21 1675,2290 R1.1
NetJ1_B5: J1.B5 R2.1 | length 141.6
  Top Layer w10: J1.B5 1651.1,2191.1 1685,2225 R2.1
NetJ5_1: J5.1 Q8.2
NetQ1_1: Q1.1 R5.2 | length 108.9
  Top Layer w10: Q1.1 2083.54,2004.68 R5.2
NetQ2_1: Q2.1 R6.2 | length 119.7
  Top Layer w10: Q2.1 2485,2023.23 R6.2
NetQ3_1: Q3.1 R8.2 | length 63.2
  Top Layer w10: Q3.1 4332.72,1599.69 4395,1599.69 R8.2
NetQ4_1: Q4.1 R11.2 | length 73.2
  Top Layer w10: Q4.1 4357.72,2064.69 4430,2064.69 R11.2
NetQ5_1: Q5.1 R12.2 | length 63.2
  Top Layer w10: Q5.1 4347.72,1829.69 4410,1829.69 R12.2
NetQ6_1: Q6.1 R16.2 | length 58.2
  Top Layer w4: R16.2@4389.69,1379.37 R16.2
  Top Layer w10: Q6.1 R16.2@4389.69,1379.37
NetQ7_1: Q7.1 R17.2 | length 68.4
  Top Layer w10: Q7.1 4323.03,1159.37 4389.69,1159.37 R17.2
NetQ8_1: Q8.1 R18.1 R19.2 | length 168
  Top Layer w10: R19.2 R18.1 1566.5,1476.5 1590,1500 Q8.1
NRST: C15.1 J2.12 SW1.A1 SW1.A2 U1.7 | length 2966
  Top Layer w10: SW1.A1 SW1.A2 2636.42,2593.58 2665,2565 2665,2360 2825.47,2199.53 U1.7 v1@3249.53,2199.53
  Bottom Layer 1 w10: v1(3250,2200) 3250,2370 3400,2520 3400,2665 3445,2710 3730,2710 4215,3195 v1(4340,3195)
PA0: J4.3 U1.12 | length 1410.9
  Top Layer w10: v1(3000,2090) 3140,2090 3151.1,2101.1 U1.12
  Bottom Layer 1 w10: v1(3000,2090) 3000,2705 3050,2755 3050,3090 3060,3100 3060,3200 J4.3
PA1: J4.2 U1.13 | length 1354.4
  Top Layer w10: v1(3030,2065) 3145,2065 3161.42,2081.42 U1.13
  Bottom Layer 1 w10: J4.2 3015,2825 2955,2765 2955,2075 2965,2065 v1(3030,2065)
PA2: J4.1 U1.14 | length 1605.5
  Top Layer w10: v1(3075,2040) 3145,2040 3166.73,2061.73 U1.14
  Bottom Layer 1 w10: J4.1 2855,3095 2855,2080 2895,2040 v1(3075,2040)
PA3: J3.1 U1.17 | length 787.1
  Top Layer w10: J3.1 2950,1535 3272.36,1857.36 U1.17
PA4: J3.2 U1.18 | length 895.3
  Top Layer w10: J3.2 3000,1240 3000,1550.91 3292.05,1842.95 U1.18
PA5: J3.3 U1.19 | length 762
  Top Layer w10: J3.3 3050,1550 3311.73,1811.73 U1.19
PA6: J3.4 U1.20 | length 870.2
  Top Layer w10: J3.4 3100,1240 3100,1555 3331.42,1786.42 U1.20
PA7: J3.5 U1.21 | length 736.9
  Top Layer w10: J3.5 3150,1555 3351.1,1756.1 U1.21
PA8: J3.16 U1.42 | length 1417.3
  Top Layer w10: U1.42 3874.53,2199.53 3979.06,2095 3979.06,1699.06 3695,1415 3695,1235 J3.16
PA9: J3.17 U1.43 | length 1342.4
  Top Layer w10: U1.43 3910.79,2219.21 4010,2120 4010,1690 3750,1430 J3.17
PA10: J3.18 U1.44 | length 1513.5
  Top Layer w10: U1.44 3956.1,2238.9 4040,2155 4040,1635 3795,1390 3795,1235 J3.18
PB0: J3.6 U1.24 | length 861.4
  Top Layer w10: J3.6 3200,1240 3200,1515 3410.16,1725.16 U1.24
PB1: J3.7 U1.25 | length 728.1
  Top Layer w10: J3.7 3250,1510 3429.84,1689.84 U1.25
PB2: J3.8 U1.26 | length 826.3
  Top Layer w10: J3.8@3250,1200 3295,1245 3295,1500 3449.53,1654.53 U1.26
PB4: J4.14 U1.57 | length 851.9
  Top Layer w10: U1.57 3410.16,2520.16 3410,2520.32 3410,2560 3400,2570 3400,2675 3615,2890 J4.14
PB9: J4.13 U1.62 | length 1032.7
  Top Layer w10: v1(3310.49,2480.49) 3315,2475.98 3315,2440 3311.73,2436.73 U1.62
  Bottom Layer 1 w10: v1(3310.49,2480.49) 3310.49,2544.51 3260,2595 3260,2670 3565,2975 3565,3210 3610,3255 J4.13
PB10: J3.9 U1.30 | length 727.5
  Top Layer w10: J3.9 3350,1445 3528.27,1623.27 U1.30
PB11: J3.10 U1.33 | length 1042
  Top Layer w10: J3.10 3400,1240 3400,1425 3715,1740 3715,2005 3697.64,2022.36 U1.33
PB12: J3.11 U1.34 | length 968.2
  Top Layer w10: J3.11 3450,1435 3755,1740 3755,2010 3722.95,2042.05 U1.34
PB15: U1.37
PC0: J4.7 U1.8 | length 1264.7
  Top Layer w10: v1(3100,2175) 3115.32,2175 3120.16,2179.84 U1.8
  Bottom Layer 1 w10: v1(3100,2175) 3100,2540 3190,2630 3190,2925 3265,3000 3265,3205 J4.7
PC1: J4.6 U1.9 | length 1185.8
  Top Layer w10: v1(3070,2155) 3130,2155 3135.16,2160.16 U1.9
  Bottom Layer 1 w10: v1(3070,2155) 3070,2555 3150,2635 3150,2945 3215,3010 J4.6
PC2: J4.5 U1.10 | length 1341.3
  Top Layer w10: v1(3045,2135) 3140,2135 3145.47,2140.47 U1.10
  Bottom Layer 1 w10: v1(3045,2135) 3045,2660 3105,2720 3105,2955 3160,3010 3160,3200 J4.5
PC3: J4.4 U1.11 | length 1255.4
  Top Layer w10: v1(3020,2115) 3140,2115 3145.79,2120.79 U1.11
  Bottom Layer 1 w10: v1(3020,2115) 3020,2680 3080,2740 3080,3120 J4.4
PC6: J3.12 U1.38 | length 1262.8
  Top Layer w10: J3.12 3500,1240 3500,1430 3855,1785 3855,2045 3779.21,2120.79 U1.38
PC7: J3.13 U1.39 | length 1173.6
  Top Layer w10: J3.13 3550,1430 3880,1760 3880,2060 3799.53,2140.47 U1.39
PC8: J3.14 U1.40 | length 1331.8
  Top Layer w10: J3.14 3595,1235 3595,1425 3905,1735 3905,2085 3829.84,2160.16 U1.40
PC9: J3.15 U1.41 | length 1256.8
  Top Layer w10: U1.41 3860.16,2179.84 3940,2100 3940,1710 3650,1420 J3.15
PC10: J4.18 U1.52 | length 885.5
  Top Layer w10: U1.52 3508.58,2623.58 3815,2930 J4.18
PC11: J4.17 U1.53 | length 993.7
  Top Layer w10: U1.53 3488.9,2643.9 3760,2915 3760,3200 J4.17
PC12: J4.16 U1.54 | length 864.6
  Top Layer w10: U1.54 3469.21,2664.21 3720,2915 3720,3150 J4.16
PC13: J4.12 U1.2 | length 1333.8
  Top Layer w10: U1.2 3097.95,2297.95 2995,2400.91 2995,2695 3070,2770 3280,2770 3515,3005 J4.12
PC14: J4.11 U1.3 | length 1518.6
  Top Layer w10: U1.3 3063.27,2278.27 2955,2386.54 2955,2715 3040,2800 3270,2800 3470,3000 3470,3210 J4.11
PC15: J4.10 U1.4 | length 1443.3
  Top Layer w10: U1.4 3041.42,2258.58 2925,2375 2925,2745 3015,2835 3260,2835 3415,2990 J4.10
PD2: J4.15 U1.55 | length 968.6
  Top Layer w10: U1.55 3449.53,2679.53 3665,2895 3665,3205 J4.15
PF0: J4.9 U1.5 | length 1631.8
  Top Layer w10: U1.5 3006.1,2238.9 2885,2360 2885,2765 2985,2865 3235,2865 3365,2995 3365,3210 J4.9@3420,3265
PF1: J4.8 U1.6 | length 1561.1
  Top Layer w10: U1.6 2975.79,2219.21 2855,2340 2855,2830 2925,2900 3210,2900 3315,3005 J4.8
STLINK_RX: J2.13 U1.23 | length 2037.8
  Top Layer w10: v1(3390,1865) 3390.47,1865.47 U1.23
  Bottom Layer 1 w10: v1(3390,1865) 3390,2040 4145,2795 4345,2795 4425,2875 4425,3165 v1(4505,3245)
STLINK_TX: J2.14 U1.22 | length 2114.2
  Top Layer w10: 3370,1920 3365.1,1915.1 3365.1,1845.86 3375,1835.96 v1(3375,1835) ; U1.22@3370.79,1926.12 U1.22
  Bottom Layer 1 w10: v1(3375,1835) 3350,1835 3330,1855 3330,2090 4065,2825 4240,2825 4390,2975 4390,3195 v1(4340,3245)
SWCLK: J2.06 U1.50 | length 1085.1
  Top Layer w10: U1.50 3547.95,2437.95 3565,2455 v1(3585,2455)
  Bottom Layer 1 w10: v1(3585,2455) 4175,3045 v1(4340,3045)
SWDIO: J2.04 U1.49 | length 1021.1
  Top Layer w10: U1.49 3567.64,2397.64 v1(3625,2455)
  Bottom Layer 1 w10: v1(3625,2455) 4165,2995 v1(4340,2995)
SWO: J2.08 U1.56 | length 1331.5
  Top Layer w10: v1(3425,2610) 3429.84,2605.16 U1.56
  Bottom Layer 1 w10: v1(3425,2610) 3680,2610 4165,3095 v1(4340,3095)
pads on no net: J1.13 J1.14 J1.15 J1.16 J1.A6 J1.A7 J1.A8 J1.B6 J1.B7 J1.B8 J2.01 J2.02 J2.10 J2.11 J5.3 J6.4 J7.4

## Polygon pours and split planes (outlines as drawn)
NetJ5_1 on Top Layer "NETJ5_1_L01_P000" (solid, pour order 0): 1400,1825 1410,1835 1465,1835 1475,1825 1475,1705 1590,1590 1590,1525 1520,1525 1400,1645
5V on Top Layer "5V_L01_P002" (solid, pour order 2): 1587.5,1800 1600,1800 1655,1745 1815,1745 1885,1675 2320,1675 2335,1660 2335,1555 2310,1530 1825,1530 1825,1555 1745,1635 1640,1635 1515,1760 1515,1820 1535,1840 1547.5,1840
3V3 on 3V3 "NONET_L03_P003" (solid, shelved, pour order 3): 1315,3605 1360,3650 5265,3650 5265,690 5140,815 1185,815
GND on GND "NONET_L02_P004" (solid, shelved, pour order 4): 1250,3640 5395,3640 5240,3485 5240,820 1235,820 1215,840

## Silkscreen, mask and mechanical layers (free items; w line width, h text height)
Top Overlay:
  lines w10: 1359.06,1876 1359.06,1995 1694.06,1995 1694.06,1876 ; 2895,830 2895,1135 ; 2895,1345 2895,1625 3900,1625 3905,1620 3905,1345 ; 2960,3100 2960,2795 3970,2795 3970,3100 ; 2960,3310 2960,3590 ; 3905,830 3905,1135 ; 3970,3310 3970,3595 ; 4899.03,3090 4790,3090 4790,2221 4901.14,2221 ; 1310,1030 ccw(c1510,1030) 1510,830 4960,830 ccw(c4960,1030) 5160,1030 5160,3395 ccw(c4960,3395) 4960,3595 1510,3595 ccw(c1510,3395) 1310,3395 1310,1030
  text "MROVER" at 1535,3340 h120
  text "PA2" at 3050,3335 h60 r90
  text "PA0" at 3150,3335 h60 r90
  text "PC2" at 3250,3335 h60 r90
  text "PC0" at 3350,3335 h60 r90
  text "PF0" at 3450,3335 h60 r90
  text "PC14" at 3550,3335 h60 r90
  text "PB9" at 3650,3335 h60 r90
  text "PD2" at 3750,3335 h60 r90
  text "PC11" at 3850,3335 h60 r90
  text "GND" at 3950,3335 h60 r90
  text "FLASHING" at 4195,3300 h60
  text "DEV BOARD" at 1535,3170 h120
  text "2026 - CK" at 1535,3070 h60
  text "5V" at 3945,2954.96 h60 r90
  text "PA1" at 3045,2914.98 h60 r90
  text "PC1" at 3245,2914.98 h60 r90
  text "PF1" at 3345,2914.98 h60 r90
  text "PC3" at 3145,2894.98 h60 r90
  text "PB4" at 3645,2894.98 h60 r90
  text "PC15" at 3445,2845 h60 r90
  text "PC13" at 3545,2845 h60 r90
  text "PC12" at 3745,2845 h60 r90
  text "PC10" at 3845,2845 h60 r90
  text "USB C" at 1485,2795 h60 r270
  text "H L G" at 4870,2760 h60 r90
  text "CAN" at 4765,2640 h60 r90
  text "H L G" at 4875,2290 h60 r90
  text "5V" at 2135,2230 h60
  text "3V3" at 2445,2210 h60
  text "G 5V" at 1415,1910 h60
  text "5V" at 1740,1865 h60 r270
  text "PA3" at 2985,1370 h60 r90
  text "PA5" at 3085,1370 h60 r90
  text "PA7" at 3185,1370 h60 r90
  text "PB1" at 3285,1370 h60 r90
  text "PB10" at 3385,1370 h60 r90
  text "PB12" at 3485,1370 h60 r90
  text "PC7" at 3585,1370 h60 r90
  text "PC9" at 3685,1370 h60 r90
  text "PA9" at 3785,1370 h60 r90
  text "3V3" at 3885,1370 h60 r90
  text "PA4" at 2980,944.96 h60 r90
  text "PA6" at 3080,944.96 h60 r90
  text "PB0" at 3180,944.96 h60 r90
  text "PB2" at 3280,944.96 h60 r90
  text "PC6" at 3480,944.96 h60 r90
  text "PC8" at 3580,944.96 h60 r90
  text "PA8" at 3680,944.96 h60 r90
  text "GND" at 3880,944.96 h60 r90
  text "PC11" at 3380,914.97 h60 r90
  text "PA10" at 3780,894.98 h60 r90

## Text inside footprints (layer, text, board x,y; h text height)
J1: Top Overlay "*" at 1580.05,2498.48 h50 r270; Top 3D Body "*" at 1580.05,2498.48 h50 r270